# EAGLE board MMPanelLayout (EAGLE 6.5.0)

Size 96.5 x 80 mm. Coordinates in mm from the lower left corner, seen from the top.
Outline: 0,48 96.5,48
Outline: 96.5,48 96.5,32
Outline: 96.5,32 96.5,0 0,0 0,32
Outline: 0,32 0,48
Outline: 96.5,48 96.5,80 0,80 0,48
Outline: 96.5,32 0,32
Copper layers (1*16): Top 0.035mm / dielectric 1.5mm / Bottom 0.035mm
Design rules "default": minimum track width 10mil, minimum drill 24mil, track to track 8mil, track to pad 8mil, pad to pad 8mil, via to via 8mil, smd to smd 8mil, copper to edge 40mil, drill to drill 8mil, minimum pad ring 10mil, minimum via ring 8mil, stop-mask expansion 4mil, vias tented up to drill 0mil, thermal gap 10mil

## Footprints (pad centres in the part's own frame; a part is rotated, then mirrored left to right if it is on the bottom)
F15V = drill 1.016 octagon: 1 9.601,1.422; 2 6.858,1.422; 3 4.115,1.422; 4 1.372,1.422; 5 -1.372,1.422; 6 -4.115,1.422; 7 -6.858,1.422; 8 -9.601,1.422; 9 8.23,-1.422; 10 5.486,-1.422; 11 2.743,-1.422; 12 0,-1.422; 13 -2.743,-1.422; 14 -5.486,-1.422; 15 -8.23,-1.422 | hole 3.302: 16.662,0; -16.662,0
F09V = drill 1.016 octagon: 1 5.486,1.422; 2 2.743,1.422; 3 0,1.422; 4 -2.743,1.422; 5 -5.486,1.422; 6 4.115,-1.422; 7 1.372,-1.422; 8 -1.372,-1.422; 9 -4.115,-1.422 | hole 3.302: -12.522,0; 12.522,0

## Placement (x,y rotation side)
E$1  [F15V]  31.4,24 0 top
E$2  [F09V]  25.2,56 0 top
E$3  [F09V]  68.6,64.77 0 top
E$4  [F09V]  68.63,47.23 0 top
E$5  [F09V]  78.3,24 0 top

## Library data of the parts
E$1-E$5 = con-subd